# Altium PCB FENCE_MONITOR.PcbDoc (part 2 of 2)
Units mm, origin at the board's own origin, x right, y up, seen from the top; angles counter-clockwise.
Board outline 22.8 x 52 mm, 2 copper layers (Top Layer, Bottom Layer), stack 1.579 mm thick; 78 components, 46 nets, 180 pads, 62 vias.
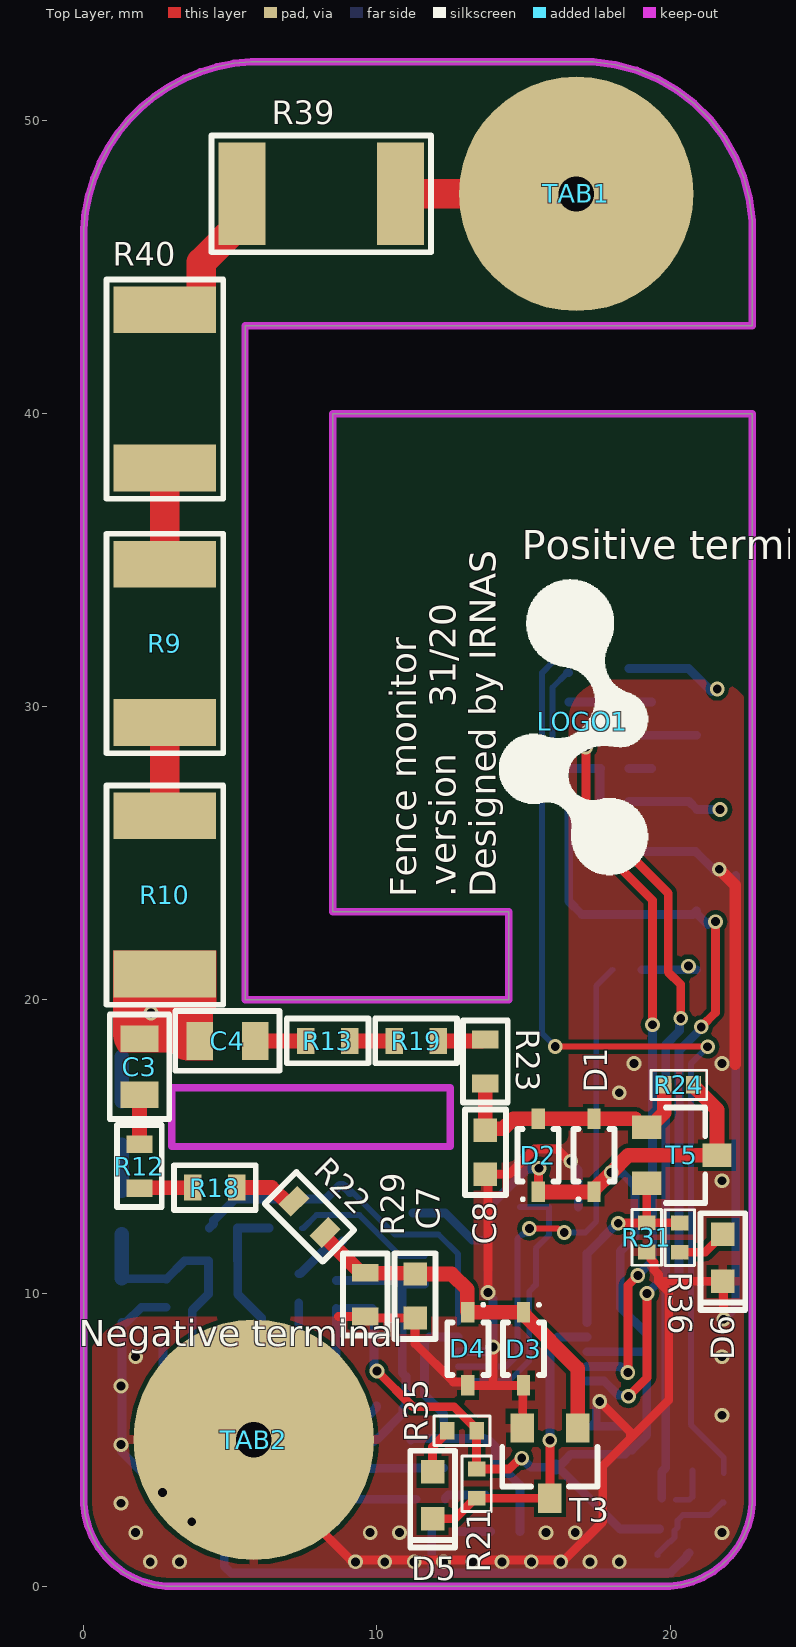
[diagram p0: Top Layer view]

## Part data (continued)
R35 R36 R41 R44: library part "R - 100R/0402", "MULTICOMP         MCMR04X1000FTL            SMD Chip Resistor, Ceramic, MCMR Series, 100 ohm, 50 V, 0402 [1005 Metric], 62.5 mW,  1%", Case Code (Imperial)=0402, Case Code (Metric)=1005, IRNAS Part No.=/, Manufacturer=Multicomp, Manufacturer Part Number=MCMR04X1000FTL, Power Rating=62.5mW, Supplier Part Number 1=2072515, Temperature Coefficient=100ppm/°C, Tolerance=1%, Voltage Rating=50V, Case/Package=0402, ComponentLink1Description=https://datasheet.ciiva.com/28692/1716705-28692087.pdf, ComponentLink1URL=https://datasheet.ciiva.com/28692/1716705-28692087.pdf, ComponentLink2Description=https://datasheet.ciiva.com/22708/1716705-22708156.pdf, ComponentLink2URL=https://datasheet.ciiva.com/22708/1716705-22708156.pdf, Composition=Ceramic, Packaging="Cut Tape", Pricing 1="10=0.0071, 100=0.0042, 500=0.003, 2500=0.0024, 5000=0.0019 (GBP)", REACH SVHC="No SVHC", Resistance=100R, Stock 1=62365, Supplier 1=Farnell, Voltage Rating (DC)=50V
R37 R38: library part "R - 4k7/0402", "4.7 kohm, MCWR Series, 50 V", IRNAS Part No.=I-100003, Manufacturer=MULTICOMP, Manufacturer Part Number=MCMR06X4701FTL, Power Rating=100, Resistance=4.7, Resistance Tolerance="± 1%", Resistor Case Style="0603 [1608 Metric]", Resistor Element Material=Ceramic, Supplier Part Number 1=2447187, Temperature Coefficient="± 100", Voltage Rating=75, Automotive Qualification Standard=-, ComponentLink1Description=Datasheet, ComponentLink1URL=http://www.farnell.com/datasheets/2860681.pdf?_ga=2.106290502.431277253.1573729600-1373726713.1554121096&_gac=1.180096854.1571402529.CjwKCAjwxaXtBRBbEiwAPqPxcCedmxiKa04iNyErqeZ3YE_megEuFQhz7mFuJRxR0uEYBmhYeHxt1xoC4MkQAvD_BwE, Packaging="Cut Tape", Pricing 1="10=0.0085, 100=0.0051, 500=0.0036, 1000=0.0028, 2500=0.0023 (GBP)", Product Range="MCMR Series", RoHS=Y-EX, Stock 1=218618, Supplier 1=Farnell, SVHC="No SVHC (12-Jan-2017)<!--FANDB--><div class=\"features-and-benefits-container\"><div class=\"features-and-benefits-description\"><span class=\"features-benefits-value\">The Multicomp MCMR series resistors are automotive grade, anti sulphured thick film chip resistor. The resistance range includes E24 and E96 decade values from 1ohm to 10Mohm. These resistors are constructed on top of a high grade ceramic body.</span></div><div class=\"features-and-benefits-list\"><ul class=\"features-and-benefits-list-list\"><li class=\"features-and-benefits-list-item\">EIA 0402, 0603, 0805, 1206 chip sizes available</li><li class=\"features-and-benefits-list-item\">High reliability and stability</li><li class=\"features-and-benefits-list-item\">Automotive grade AEC-Q200 compliant</li><li class=\"features-and-benefits-list-item\">Complaint with (IEC 60068-1) 55/155/56 climatic category</li><li class=\"features-and-benefits-list-item\">Maximum operation voltage of 50V, 75V, 150V and 200V</li><li class=\"features-and-benefits-list-item\">Power rating of 62.5mW, 100mW, 125mW and 250mW</li><li class=\"features-and-benefits-list-item\">Available in ±1% and ±5% tolerance</li><li class=\"features-and-benefits-list-item\">Temperature coefficient (TCR) of +200ppm/°C, +100ppm/°C and -200ppm/°C to +400ppm/°C</li><li class=\"features-and-benefits-list-item\">Operating temperature range -55°C to 155"
R42 R43: library part "R - 47R/0402", "MULTICOMP - MCMR06X4702FTL - RES, CERAMIC, 47R, 1%, 0.1W, 0402", Manufacturer=MULTICOMP, Manufacturer Part Number=MCMR06X4702FTL, Power Rating=100, Resistance=47, Resistance Tolerance="± 1%", Resistor Case Style="0603 [1608 Metric]", Resistor Element Material=Ceramic, Supplier Part Number 1=1469719, Temperature Coefficient="± 100", Voltage Rating=75, Automotive Qualification Standard="-<!--FANDB--><div class=\"features-and-benefits-container\"><div class=\"features-and-benefits-description\"><span class=\"features-benefits-value\">The Multicomp MCMR series resistors are automotive grade, anti sulphured thick film chip resistor. The resistance range includes E24 and E96 decade values from 1ohm to 10Mohm. These resistors are constructed on top of a high grade ceramic body.</span></div><div class=\"features-and-benefits-list\"><ul class=\"features-and-benefits-list-list\"><li class=\"features-and-benefits-list-item\">EIA 0402, 0603, 0805, 1206 chip sizes available</li><li class=\"features-and-benefits-list-item\">High reliability and stability</li><li class=\"features-and-benefits-list-item\">Automotive grade AEC-Q200 compliant</li><li class=\"features-and-benefits-list-item\">Complaint with (IEC 60068-1) 55/155/56 climatic category</li><li class=\"features-and-benefits-list-item\">Maximum operation voltage of 50V, 75V, 150V and 200V</li><li class=\"features-and-benefits-list-item\">Power rating of 62.5mW, 100mW, 125mW and 250mW</li><li class=\"features-and-benefits-list-item\">Available in ±1% and ±5% tolerance</li><li class=\"features-and-benefits-list-item\">Temperature coefficient (TCR) of +200ppm/°C, +100ppm/°C and -200ppm/°C to +400ppm/°C</li><li class=\"features-and-benefits-list-item\">Operating temperature range -55°C to 155", Packaging="Cut Tape", Pricing 1="10=0.0115, 100=0.009, 500=0.0064, 1000=0.0051, 2500=0.0042, 5000=0.0032, 25000=0.0021, 50000=0.0017 (GBP)", Product Range="MCMR Series", RoHS=Y-EX, Stock 1=21427, Supplier 1=Farnell
T1: library part "T_M - VT6M1T2CR", "Dual MOSFET, N and P Channel, 100 mA, 20 V, 2.5 ohm, 4.5 V, 1 V", Supplier Part Number 1=2706721, Author="Ciril Golob", ComponentLink1Description=Datasheet, ComponentLink1URL=c:\ELRADSVN\Altium_Library\Libraries\Active\Datasheet\BSS123.pdf, ComponentLink2Description="Datasheet www", ComponentLink2URL=http://www.onsemi.com/pub/Collateral/BSS123-D.PDF, Date=11.07.2018, ELRAD Id sifra / ELRAD Id No=597778, FIT=0.44, Komp / Device=SMD, Manufacturer Part Number=VT6M1T2CR, Opis / Description="MOSFET BSS123       /N-Channel", Supplier 1=Farnell, Velikost / Size=SOT23
T2 T3 T4 T5: library part "T_B - BC847B,215", "MOSFET Transistor, N Channel, 310 mA, 60 V, 0.86 ohm, 10 V, 1 V", Manufacturer="ON SEMICONDUCTOR", Manufacturer Part Number=BC847B,215, Supplier Part Number 1=2317616, Author="Ciril Golob", ComponentLink1Description=Datasheet, ComponentLink1URL=C:\ELRADSVN\Altium_Library\Libraries\Active\Datasheet\2N7002ET1G.pdf, ComponentLink2Description="Datasheet www", ComponentLink2URL=http://www.onsemi.com/pub/Collateral/BSS123-D.PDF, Date=11.07.2018, FIT=0.44, Komp / Device=SMD, Supplier 1=Farnell, Supplier 2=Mouser, Supplier Part Number 2=863-2N7002ET1G, Velikost / Size=SOT23
TAB1 TAB2: library part "TAB - WP-SMBU SMD", "WP-SMBU SMD Internal blind-hole thread w. Pins", Supplier Part Number 1=2405986, ComponentLink1Description=Datasheet, ComponentLink1URL=https://katalog.we-online.com/em/datasheet/7466103.pdf, Supplier 1=Farnell
U1: library part "ADC - ADS1015IDGST", "Analogue to Digital Converter, 12 bit, 3.3 kSPS, Differential, Single Ended, I2C, Single", Manufacturer="TEXAS INSTRUMENTS", Supplier Part Number 1=3116553, ComponentLink1Description=Datasheet, ComponentLink1URL=https://www.nxp.com/docs/en/data-sheet/PCF8591.pdf, Manufacturer Part Number=ADS1015IDGST, Supplier 1=Farnell
U2: library part "OP - TLV9052IDR", "General Purpose Amplifier 2 Circuit Rail-to-Rail 8-SOIC", Case/Package=SOT-23, Input Bias Current=50pA, Input Offset Voltage (Vos)=1.5mV, Manufacturer="Texas Instruments", Max Operating Temperature=125°C, Max Supply Voltage=5.5V, Min Operating Temperature=-40°C, Min Supply Voltage=1.8V, Nominal Supply Current=5.5uA, Operating Supply Current=2.9uA, Output Current per Channel=5mA, Package Quantity=250, Power Supply Rejection Ratio (PSRR)=113.98dB, Supplier Part Number 1=296-53049-1-ND, Voltage Gain=120dB, Bandwidth=90kHz, Common Mode Rejection Ratio=90dB, ComponentLink1Description=Datasheet, ComponentLink1URL=http://ww1.microchip.com/downloads/en/DeviceDoc/21669D.pdf, Gain Bandwidth Product=90kHz, Height=1.15mm, Lead Free="Lead Free", Length=2.9mm, Manufacturer Part Number=TLV9052IDR, Max I/O Voltage=1.5mV, Nominal Gain Bandwidth Product=90kHz, Number of Amplifiers=1, Number of Channels=1, Number of Circuits=1, Number of Elements=1, Number of Pins=5, Packaging="Tape and Reel", Pricing 1="1=1.09, 25=0.954, 50=0.841, 100=0.728, 250=0.686, 500=0.644, 1000=0.509, 2500=0.502 (EUR)", Radiation Hardening=No, REACH SVHC="No SVHC", Slew Rate=0.03V/µs, Stock 1=215, Supplier 1=Digi-Key, Unity Gain Bandwidth Product=90kHz, Width=1.6mm

## Free pads (board coordinates)
  rect 2.5x1.8 smd far side: 2(13.979,5.708)
  rect 1.8x2.2 smd far side: 2(16.916,10.531)

## Via types
v1: diameter 0.5, hole 0.3, Top Layer to Bottom Layer, tented both sides, 60 vias
v2: diameter 1.2, hole 1.2, Top Layer to Bottom Layer, 2 vias

## Nets (pads, with @x,y where several pads share a name; then routed paths per layer and width w, separated by ;. In a path a pad name is that pad's centre, name@x,y a point inside that pad or via, vN(x,y) a via of type N, cw(c..) or ccw(c..) an arc to the next point about the centre after c; other vN are vias at no path point)
+2.5V: D7.K P1.2 R4.2 R37.2 R38.2 T1.4 | length 34.2
  Top Layer w0.3: v1(21.06,19.08) 21.549,19.569 v1(21.549,22.67)
  Bottom Layer w0.2: R38.2@16.49,26.89 15.988,27.392 15.988,30.658 R37.2@16.49,31.16
  Bottom Layer w0.3: R38.2@16.49,26.89 R38.2 16.54,23.37 16.995,22.915 D7.K 20.785,22.915 P1.2 ; R37.2@16.49,31.16 R37.2 ; T1.4@19.715,3 19.715,3.905 19.852,4.042 19.852,9.987 20.305,10.439 20.305,18.271 21.06,19.026 v1(21.06,19.08) ; P1.2@20.865,22.995 21.287,22.573 21.385,22.67 v1(21.549,22.67)
+2V5: C1.2 C2.2 C14.2 C15.2 C16.2 D1.1 D2.1 R2.2 R3.2 R21.2 R24.2 R35.2 T1.3 T2.3 T4.3 T5.3 U1.8 U2.8 | length 50.2
  Top Layer w0.3: v1(10,7.34) 11.22,6.12 12.63,6.12 13.4,5.35 R35.2 R21.2 14.516,4 14.886,4.37 v1(14.94,4.37) ; D2.1 15.515,13.465 15.515,14.245 v1(15.53,14.26)
  Top Layer w0.5: D2.1@15.546,13.45 D1.1@17.331,13.45 ; D1.1 17.4,13.525 v1(17.988,14.113) 18.575,14.7 T5.3 21.6,16.25 20.8,17.05 R24.2
  Bottom Layer w0.3: U2.8@8.608,7.402 U2.8 8.605,8.2 U2.8@8.66,8.255 ; U2.8@8.61,8.255 C16.2 ; C16.2@8.8,9.47 9.84,9.47 9.9,9.41 C14.2 9.9,7.44 v1(10,7.34) ; T4.3 12.33,12.73 13.26,11.8 R3.2 13.83,11.84 13.83,12.89 R2.2 13.87,12.98 15.112,14.222 15.492,14.222 v1(15.53,14.26) ; v1(14.94,4.37) 15.25,4.06 T2.3 ; U1.8 19.2,8 ; v1(17.988,14.113) 18.002,14.098 18.362,14.098 18.8,13.66 18.8,11.93 18.3,11.43 18.3,9.51 19.2,8.61 19.2,8 ; T1.3@19.634,1.95 18.3,1.95 16.19,4.06 16.44,4.31 16.44,4.324 16.616,4.5 C1.2 C2.2 18.61,4.65 18.698,4.65 19.2,5.152 19.2,8
  Bottom Layer w0.5: T2.3 T2.3@16.1,4.07
ALERT/RDY: R3.1 R5.2 R41.2 U1.2 | length 18.1
  Top Layer w0.2: v1(15.2,12.2) 16.175,12.2 16.308,12.067 v1(16.389,12.067)
  Bottom Layer w0.2: U1.2 14.407,7.5 14.79,7.883 R5.2 R3.1 14.79,11.85 14.94,12 14.99,12 15.023,12.033 15.193,12.033 15.193,12.193 v1(15.2,12.2) ; v1(16.389,12.067) 17.103,12.067 17.48,12.443 17.48,20.48 R41.2
GND: C1.1 C2.1 C6.1 C7.1 C8.1 C9.1 C11.1 C12.1 C13.1 C14.1 C15.1 C16.1 D3.2 D4.2 D6.1 D7.A P1.3 R1.2 R5.1 R7.1 R17.1 R29.1 R30.1 R31.1 R32.1 T1.1 T3.2 TAB2.1 U1.3 U2.4 | length 126.6
  Top Layer w0.3: TAB2.1@5.8,6.32 v2(5.8,5) 5.8,4.2 9.1,0.9 9.268,0.9 10.268,0.9 11.268,0.9 12.268,0.9 13.268,0.9 14.268,0.9 15.268,0.9 16.4,0.9 17.7,2.2 17.7,4.1 18.65,5.05 ; 8.68,9.2 R29.1 9.65,9.15 C7.1 11.3,8.28 12.609,6.971 13.025,6.971 13.1,6.896 D4.2 14.05,6.85 ; v1(13.79,10.019) 13.79,13.96 C8.1 14.51,14.05 15.37,14.91 16.146,14.91 16.556,14.5 v1(16.61,14.5) ; v1(13.96,8.16) 13.96,6.94 14.05,6.85 ; T3.2 14.975,5.425 14.975,6.825 D3.2 14.05,6.85 ; v1(17.6,6.3) 18.65,5.25 18.65,5.05 ; R31.1 19.25,11.4 19.35,11.3 19.35,11.151 19.452,11.049 19.452,10.793 19.6,10.645 19.6,10.4 ; v1(21.825,9.105) 21.825,10.375 D6.1 19.74,10.4 19.6,10.4 ; 18.65,5.05 18.75,5.15 19.955,6.355 19.955,10.045 19.6,10.4
  Top Layer w0.4: v1(21.675,24.459) 22.217,23.916 22.217,17.808
  Bottom Layer w0.3: C9.1 1.97,9.52 1.45,9 R30.1 1.3,6.83 1.3,4.83 1.3,4.58 v1(2.683,3.197) v1(3.68,2.2) U2.4 4.795,0.685 5.03,0.45 11.838,0.45 ; v2(5.8,5) 5.86,4.94 9.88,4.94 R17.1 10.01,5.02 10.89,5.9 10.89,6.06 R32.1 10.99,7.15 10.86,7.28 C14.1 10.86,10.254 10.804,10.31 ; C16.1 C15.1 10.684,10.43 10.804,10.31 ; C11.1 10.804,10.31 ; C6.1 11.87,0.482 11.838,0.45 ; U1.3 13.746,8 ; R5.1 13.79,9.965 13.96,9.795 v1(13.96,8.16) ; v1(16.61,14.5) 16.61,14.446 16.87,14.186 R1.2 ; C1.1 C1.1@17.33,5.46 ; v1@17.48,6.126 17.48,5.61 C1.1@17.33,5.46 ; C2.1 C1.1@17.33,5.46 ; C13.1 18.597,27.893 19.361,27.893 19.368,27.886 ; C12.1 19.37,30.16 ; D7.A P1.3@20.865,25.065 ; R7.1@20.65,1.139 R7.1 20.57,1.009 20.011,0.45 11.838,0.45 ; P1.3 P1.3@21.5,24.43 ; v1(21.825,9.105) 22.239,9.519 22.239,24.243
  other v1: 2.268,0.83 3.268,0.83 9.268,0.83 10.268,0.83 11.268,0.83 12.268,0.83 13.268,0.83 14.268,0.83 15.268,0.83 16.268,0.83 17.268,0.83 18.268,0.83 1.768,1.83 9.768,1.83 10.768,1.83 15.768,1.83 16.768,1.83 21.768,1.83 1.268,2.83 1.268,4.83 21.768,5.83 1.268,6.83 1.768,7.83 21.768,7.83 21.768,13.83 18.268,16.83 18.768,17.83 21.768,17.83
MEASURE_NEG: C10.2 R33.1 R34.2 T4.2 U1.5 | length 12.8
  Bottom Layer w0.2: T4.2 8.93,13.68 10.61,12 12.1,12 12.77,11.33 12.77,9.898 U1.5
  Bottom Layer w0.3: C10.2 4.43,12.37 4.43,12.475 5.165,13.21 R33.1 R34.2 8.26,13.21 8.73,13.68 T4.2 T4.2@9.08,13.43
MEASURE_POS: C5.2 pad.2@13.979,5.708 R11.1 R15.2 T2.2 U1.4 | length 11
  Bottom Layer w0.3: C5.2 11.2,5.04 R11.1 ; U1.4 11.796,8.5 11.62,8.324 11.62,6.54 12.28,5.88 R11.1 ; R15.2 14.88,3.45 14.04,4.29 14.04,4.76 13.79,5.01 T2.2 13.66,5.04 R11.1
MONITOR_EN: R6.1 R44.2 | length 35.7
  Top Layer w0.2: v1(16.08,18.41) 16.085,18.405 21.275,18.405 v1(21.28,18.4)
  Bottom Layer w0.2: 15.988,31.513 15.635,31.161 15.635,18.855 v1(16.08,18.41) ; 15.988,31.515 16.135,31.662 ; 16.137,31.662 16.154,31.68 17.22,31.68 17.4,31.5 17.45,31.5 17.6,31.35 R44.2 ; v1(21.28,18.4) 21.28,18.398 20.707,17.826 20.707,5.513 21.83,4.39 R6.1
NetC3_1: C3.1 R12.2 | length 1.7
  Top Layer w0.5: R12.2 C3.1
NetC3_2: C3.2 C4.2 R10.2 R14.2 | length 1
  Bottom Layer w0.5: R14.2 2.293,19.55 v1(2.294,19.552)
NetC4_1: C4.1 R13.2 | length 1.7
  Top Layer w0.5: C4.1 R13.2
NetC5_1: C5.1 R11.2 R17.2 U2.2 | length 6.2
  Bottom Layer w0.3: U2.2 7.335,3 8.355,4.02 R17.2 9.965,4.025 11.145,4.025 C5.1 11.155,4.035 12.275,4.035 R11.2
NetC6_2: C6.2 R15.1 | length 1
  Bottom Layer w0.3: C6.2 R15.1
NetC7_2: C7.2 D3.1 D4.1 R22.1 R29.2 T3.1 | length 13.2
  Top Layer w0.5: R22.1 8.191,12.03 8.191,11.959 9.45,10.7 R29.2 9.625,10.675 11.275,10.675 C7.2 12.55,10.65 13.075,10.125 13.075,9.375 D4.1 D3.1 15,9.275 16.85,7.425 T3.1
NetC8_2: C8.2 D1.2 D2.2 R23.1 R24.1 T5.1 | length 9.1
  Top Layer w0.5: R23.1 C8.2 13.75,15.6 14.3,15.6 14.65,15.95 D2.2 D1.2 18.8,15.95 19.1,15.65 T5.1 19.3,15.65 19.8,16.15 R24.1
NetC9_2: C9.2 R16.1 R25.1 R26.2 R28.2 R30.2 | length 7.6
  Bottom Layer w0.3: R30.2 1.31,10.49 2.79,10.49 C9.2 2.82,10.48 3.44,11.1 R28.2 R26.2 4.25,9.96 3.7,9.41 R16.1
  Bottom Layer w0.5: R30.2 R25.1
NetC10_1: C10.1 R26.1 R28.1 R33.2 U2.6 | length 6.2
  Bottom Layer w0.3: C10.1 C10.1@5.245,12.215 ; U2.6 6.065,9.145 5.25,9.96 R26.1 R28.1 5.245,11.105 C10.1@5.245,12.215 ; R33.2 6.315,12.215 C10.1@5.245,12.215
NetC11_2: C11.2 R34.1 | length 5
  Bottom Layer w0.2: R34.1 7.49,12.21 7.94,12.66 9.4,12.66 10.79,11.27 C11.2
NetD5_2: D5.2 R35.1 | length 1.6
  Top Layer w0.3: D5.2 11.9,4.75 12.3,5.15 12.4,5.25 R35.1
NetD6_2: D6.2 R36.1 | length 1.7
  Top Layer w0.3: R36.1 21.191,11.391 D6.2
NetP1_1: P1.1 R41.1 | length 1.9
  Bottom Layer w0.3: R41.1 P1.1
  other v1: 20.625,21.153
NetP1_4: P1.4 R42.1 | length 3.2
  Bottom Layer w0.3: R42.1 20.64,26.77 20.917,26.493 v1(21.704,26.493)
NetP1_5: P1.5 R43.1 | length 2.3
  Bottom Layer w0.3: R43.1 P1.5
NetP1_6: P1.6 R44.1 | length 3.4
  Bottom Layer w0.3: R44.1 20.63,31.3 21.42,30.51 21.517,30.607 v1(21.606,30.607)
NetR1_1: R1.1 R2.1 U1.1 | length 9.2
  Bottom Layer w0.2: U1.1 14.505,7 15.197,7.692 15.197,10.057 15.42,10.28 15.42,11.526 15.87,11.975 R1.1 R2.1
NetR4_1: R4.1 T1.5 T1.6 | length 1.5
  Bottom Layer w0.2: T1.5 T1.6 20.66,2.95 20.76,3.05 R4.1
NetR6_2: R6.2 R7.2 T1.2 | length 3.3
  Bottom Layer w0.2: R7.2 19.57,1.109 19.978,1.518 20.009,1.518 20.15,1.659 20.15,1.9 20.25,2 20.25,2.241 20.439,2.43 21.35,2.43 21.78,2.86 R6.2
NetR8_1: R8.1 U2.1 | length 3.4
  Bottom Layer w0.3: U2.1 8.605,2.82 8.755,2.97 R8.1
NetR8_2: R8.2 T2.1 | length 1.4
  Bottom Layer w0.3: R8.2 12.33,3.01 12.43,3.11 T2.1
NetR9_1: R9.1 R40.2 | length 3.3
  Top Layer w1: R9.1 R40.2
NetR9_2: R9.2 R10.1 | length 3.2
  Top Layer w1: R10.1 R9.2
NetR12_1: R12.1 R18.2 | length 1.8
  Top Layer w0.5: R12.1 1.91,13.59 3.71,13.59 R18.2
NetR13_1: R13.1 R19.2 | length 1.5
  Top Layer w0.5: R13.1 R19.2
NetR14_1: R14.1 R20.2 | length 1.5
  Bottom Layer w0.5: R20.2 R14.1
NetR16_2: R16.2 U2.3 | length 7.6
  Bottom Layer w0.3: R16.2 2.7,6.365 6.065,3 U2.3
NetR18_1: R18.1 R22.2 | length 2.2
  Top Layer w0.5: R18.1 6.417,13.6 6.993,13.024 7.064,13.024 R22.2
NetR19_1: R19.1 R23.2 | length 1.6
  Top Layer w0.5: R19.1 13.579,18.6 ccw(c13.579,18.771) R23.2
NetR20_1: R20.1 R25.2 | length 1.5
  Bottom Layer w0.5: R25.2 R20.1
NetR27_1: R27.1 U2.7 | length 2.3
  Bottom Layer w0.3: R27.1 7.332,9.658 7.332,7.402 U2.7
NetR27_2: R27.2 T4.1 | length 2
  Bottom Layer w0.3: R27.2 7.38,10.66 8.25,11.53 8.58,11.53 T4.1
NetR32_2: R32.2 U2.5 | length 6.7
  Bottom Layer w0.3: U2.5 4.795,6.6 5.454,5.941 6.558,5.941 6.939,5.56 9.44,5.56 9.99,6.11 R32.2
NetR39_1: R39.1 TAB1.1 | length 6
  Top Layer w1: R39.1 TAB1.1@16.8,47.5
  other v2: 16.8,47.49
NetR39_2: R39.2 R40.1 | length 5.6
  Top Layer w1: R40.1 3.712,43.54 4.012,43.84 4.012,45.162 5.4,46.55 R39.2
PULSE_NEG: D5.1 R21.1 T3.3 U1.7 | length 10.9
  Top Layer w0.3: D5.1 12.65,2.3 13.35,3 R21.1 T3.3 v1(15.9,4.98)
  Bottom Layer w0.3: v1(15.9,4.98) 15.9,8.226 16.174,8.5 U1.7
PULSE_POS: pad.2@16.916,10.531 R31.2 R36.2 T5.2 U1.6 | length 7.3
  Top Layer w0.3: v1(18.23,12.38) 18.24,12.39 19.19,12.39 R31.2 ; T5.2 R31.2 ; R36.2 20.324,12.396 19.204,12.396 R31.2
  Bottom Layer w0.3: U1.6 17.17,11.35 18.2,12.38 v1(18.23,12.38)
SCL: C13.2 R38.1 R42.2 U1.10 | length 26
  Top Layer w0.3: v1(18.184,26.067) 18.184,25.396 19.939,23.641 19.939,20.945 20.36,20.525 v1(20.36,19.37) ; v1(18.58,6.48) 19.213,7.113 v1(19.213,9.987)
  Bottom Layer w0.3: R38.1 16.545,27.895 C13.2@17.625,27.895 ; U1.10 17.745,7 18.227,6.518 18.542,6.518 v1(18.58,6.48) ; C13.2 C13.2@17.625,27.895 ; v1(18.184,26.067) 18.184,26.176 R42.2 17.61,26.79 17.61,27.88 C13.2@17.625,27.895 ; v1(19.213,9.987) 19.852,10.626 19.852,18.476 20.322,18.946 20.322,19.332 v1(20.36,19.37)
SDA: C12.2 R37.1 R43.2 U1.9 | length 27
  Top Layer w0.3: v1(17.128,28.627) 17.128,25.672 19.397,23.403 v1(19.397,19.153) ; v1(18.56,7.29) 18.56,10.26 v1(18.9,10.6)
  Bottom Layer w0.3: R37.1 C12.2 17.615,30.135 17.615,29.055 R43.2 17.187,28.627 v1(17.128,28.627) ; U1.9 18.296,7.5 18.506,7.29 v1(18.56,7.29) ; v1(18.9,10.6) 19.4,11.1 19.4,19.15 v1(19.397,19.153)

## Polygon pours and split planes (outlines as drawn)
GND on Bottom Layer "GND_L02_P000" (solid, remove dead copper, pour order 0): 21.917,32.09 16.261,32.09 ccw(c16.261,30.709) 14.88,30.709 14.88,15.59 cw(c13.74,15.59) 13.74,14.45 6.37,14.45 ccw(c6.37,10.56) 2.48,10.56 2.48,9.82 1.37,9.82 0,8.45 0,3 ccw(c3,3) 3,0 19.799,0 ccw(c19.799,3.002) 22.8,3.002 22.8,31.207 ccw(c21.917,31.207)
GND on Top Layer "GND_L01_P001" (solid, remove dead copper, pour order 1): 0,3 0,7.1 cw(c2.1,7.1) 2.1,9.2 13.3,9.2 13.3,14.45 14.383,14.45 ccw(c14.383,14.999) 14.772,14.611 14.984,14.823 cw(c15.558,14.249) 15.559,15.061 16.215,15.061 ccw(c16.215,15.386) 16.54,15.386 16.54,29.5 cw(c17.96,29.5) 17.96,30.92 21.36,30.92 cw(c21.36,29.48) 22.8,29.48 22.8,3.001 cw(c19.799,3.001) 19.799,0 3,0 cw(c3,3)

## Keep-outs
Keep-Out Layer:
  lines w0.254: 0,2.804 0,3 0,17.6 0,18.6 0,46 0,46.295 0.058,46.881 0.173,47.459 0.344,48.024 0.569,48.568 0.847,49.088 1.175,49.578 1.549,50.034 1.966,50.451 2.421,50.825 2.912,51.153 3.431,51.43 3.976,51.656 4.54,51.827 5.118,51.942 5.705,52 6,52 17,52 17.38,52 18.134,51.901 18.868,51.704 19.571,51.413 20.229,51.033 20.832,50.57 21.37,50.033 21.832,49.429 22.213,48.771 22.504,48.069 22.7,47.334 22.8,46.581 22.8,46.2 22.8,43 5.5,43 5.5,20 8.5,20 14.5,20 14.5,23 8.5,23 8.5,40 22.8,40 22.8,30.5 22.8,22.5 22.8,18.6 22.8,17.6 22.8,3.002 22.8,2.805 22.749,2.415 22.647,2.035 22.496,1.671 22.3,1.331 22.06,1.018 21.782,0.74 21.47,0.501 21.129,0.304 20.765,0.153 20.385,0.052 19.995,0 19.799,0 3,0 2.803,0 2.413,0.052 2.033,0.153 1.67,0.304 1.329,0.5 1.017,0.74 0.739,1.018 0.5,1.33 0.303,1.671 0.153,2.034 0.051,2.414 0,2.804 ; 3,15 12.5,15 12.5,17 3,17 3,15

## Other copper
Top Layer:
  region net NetC3_2: 1.012,21.68 1.012,18.795 ccw(c1.825,18.795) 1.25,18.22 2.81,18.22 cw(c2.81,17.81) 3.1,18.1 ccw(c3.462,18.462) 3.462,17.95 4.4,17.95 4.4,19.528 cw(c4.554,19.528) 4.445,19.636 ccw(c4.284,19.798) 4.512,19.798 4.512,21.68
Bottom Layer:
  region: 11.42,51.7
  region: 17.92,49.17

## Silkscreen, mask and mechanical layers (free items; w line width, h text height)
Top Overlay:
  text "Positive terminal" at 14.938,35.031 h1
  text "Fence monitor / .version    31/20 / Designed by IRNAS" at 14.046,23.5 h0.9 r90
  text "Negative terminal" at -0.165,8.181 h0.9
Route Tool Path:
  drawing of 262 lines, arcs and shapes, not listed
Mechanical 4:
  the board outline again, w0.254